# Altium PCB IRPCB.PcbDoc
Units mil, origin at the board's own origin, x right, y up, seen from the top; angles counter-clockwise.
Board outline 6000 x 4000 mil, 2 copper layers (Top Layer, Bottom Layer); 12 components, 8 nets, 33 pads, 0 vias.
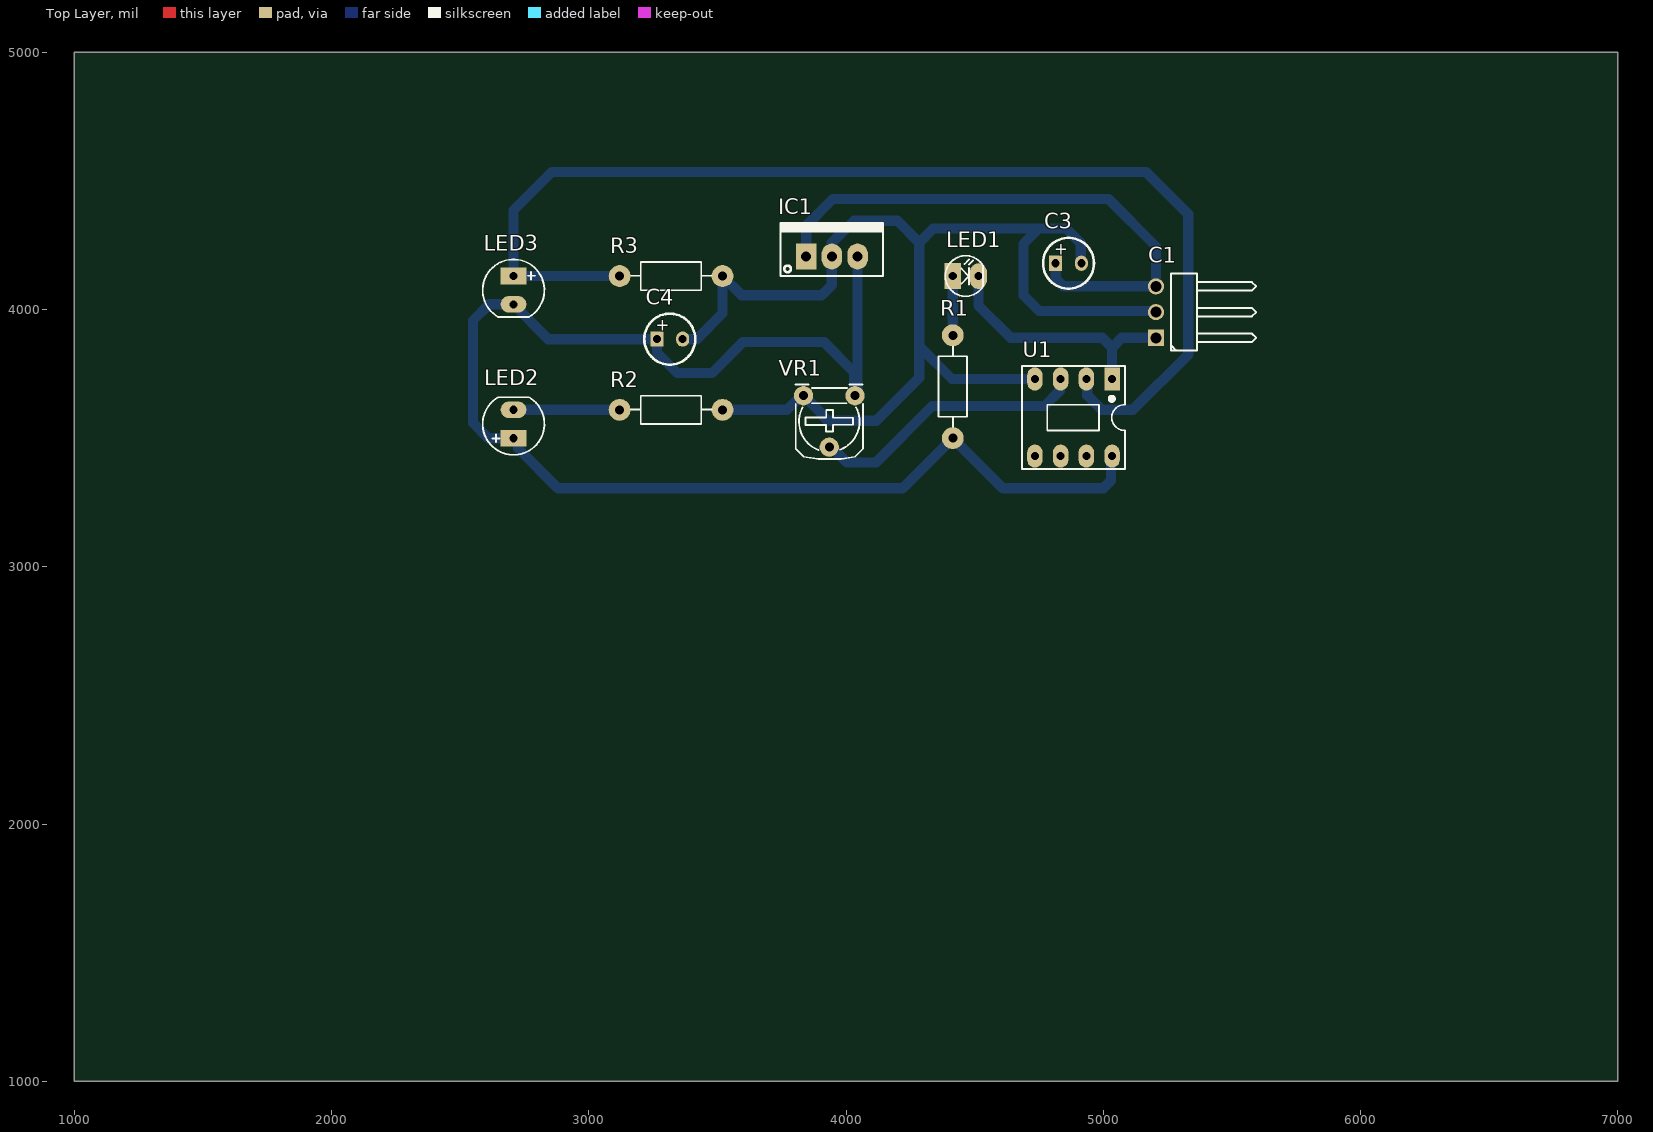
[diagram p0: Top Layer view]
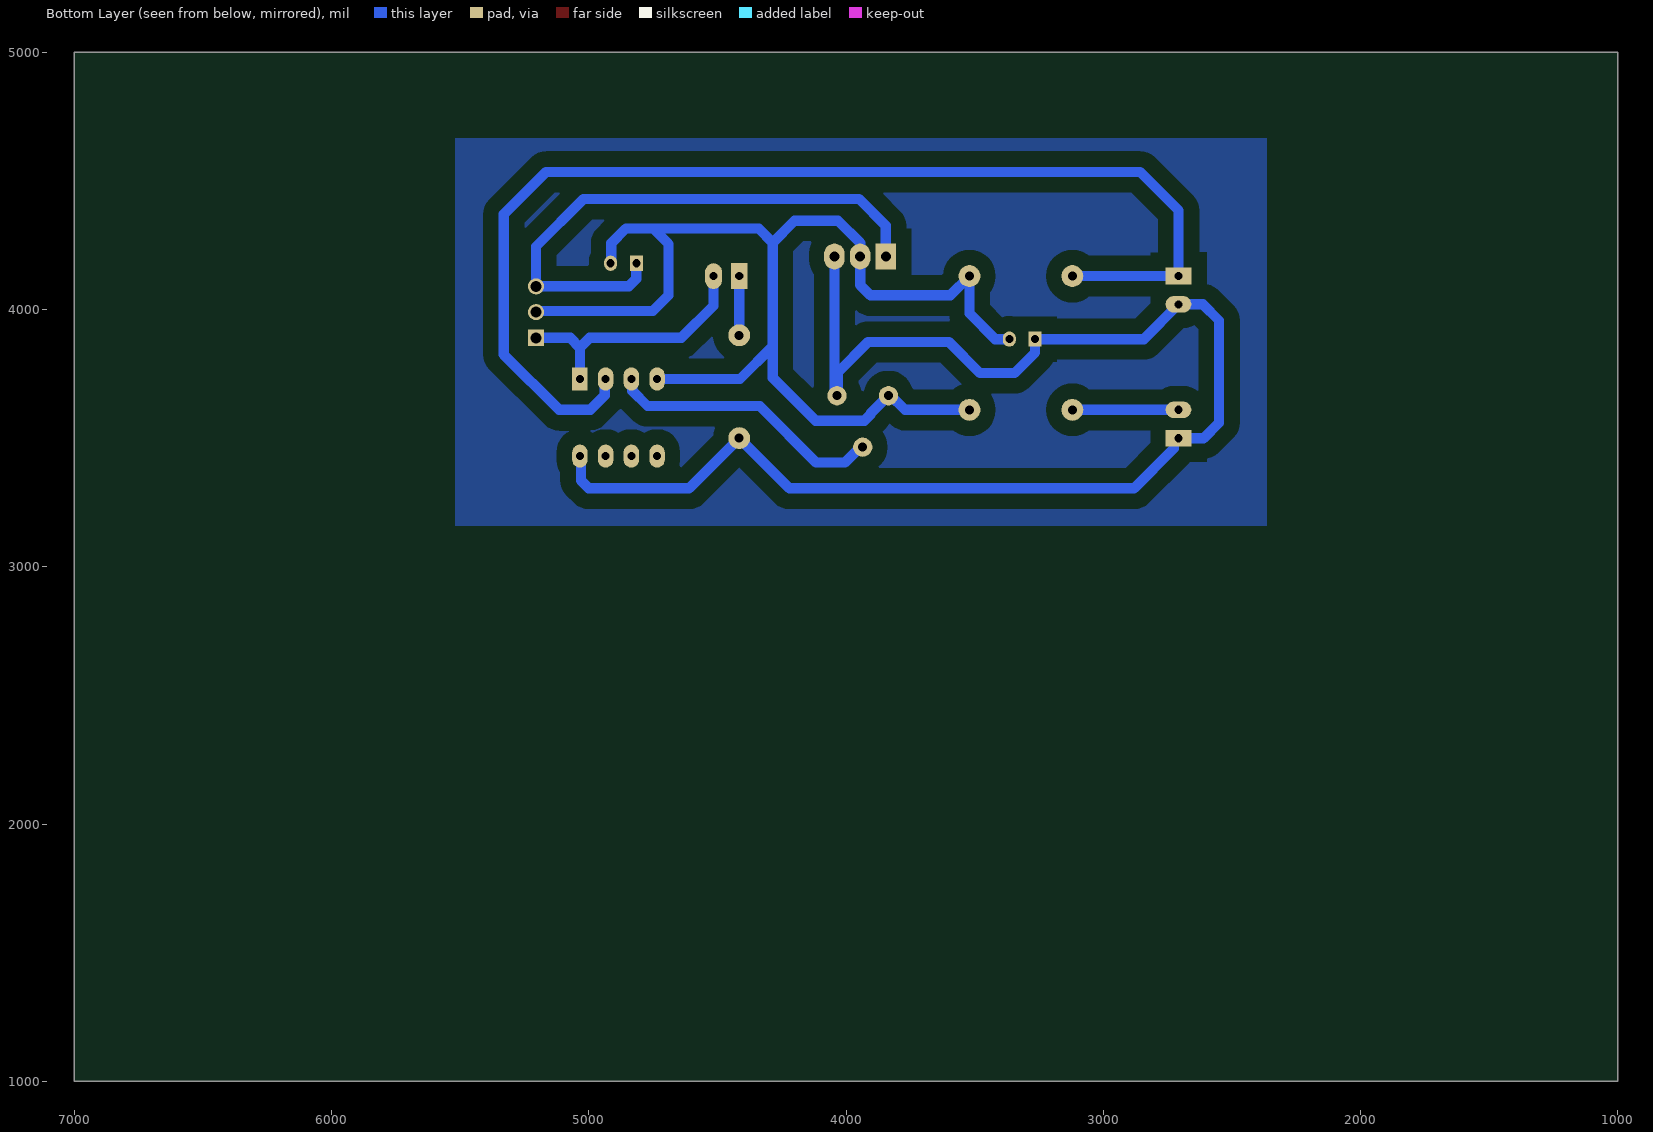
[diagram p1: Bottom Layer view, seen from below]
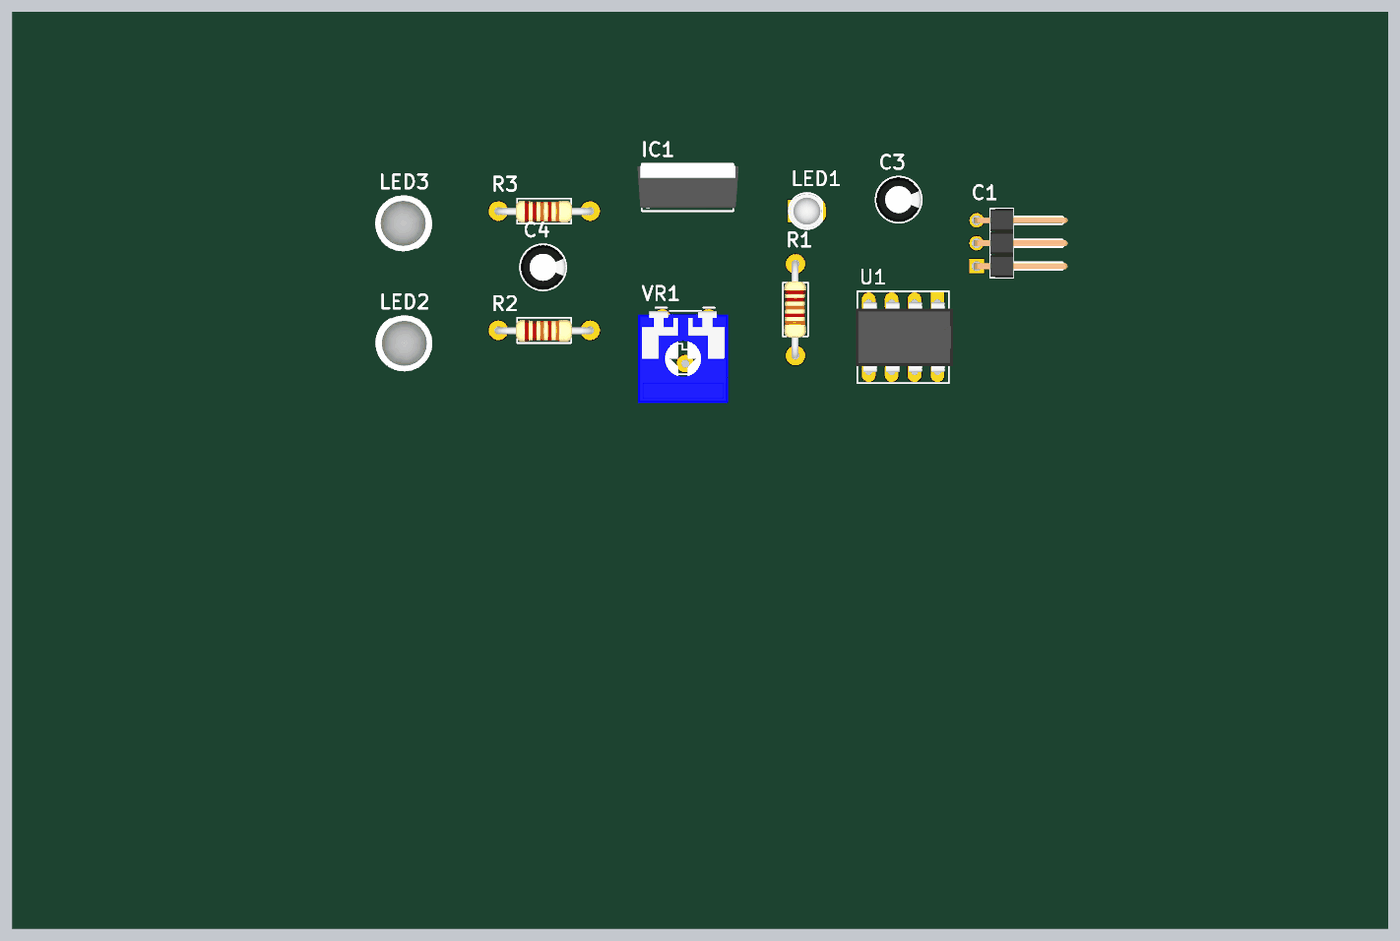
[diagram p2: 3D render of the assembled board from above, using the file's embedded part models]

## Layer stack, top to bottom
Top Solder: solder mask 0.4, Solder Resist, Dk 3.5
Top Layer: signal copper 1.4
Dielectric 1: dielectric 12.6, FR-4, Dk 4.8
Bottom Layer: signal copper 1.4
Bottom Solder: solder mask 0.4, Solder Resist, Dk 3.5

## Board outline
1000,1000 7000,1000 7000,5000 1000,5000

## Design rules (kind name [scope] priority, off if disabled: settings)
Clearance [All] p1: gap=60 ignorepadtopadclearanceinfootprint=FALSE
PolygonConnect [All] p1: connectstyle=Relief reliefconductorwidth=10 reliefentries=4 polygonreliefangle="90 Angle" airgapwidth=10
RoutingLayers [All] p1: top layer_v5=FALSE bottom layer_v5=TRUE
RoutingVias [All] p1: holewidth=28 width=50 viastyle="Through Hole" minholewidth=28 minwidth=50 maxholewidth=28 maxwidth=50
SolderMaskExpansion [All] p1: expansion=4
UnRoutedNet [All] p1: checkbadconnections=TRUE
Width [All] p1: maxlimit=50 minlimit=40 preferedwidth=40
28 further rules are at their usual default settings.

## Components (designator, comment, footprint, x,y, rotation, side; value= is the part's Value field where it differs from the comment)
C1 "JP3" JP3-D1C 5305,4140 r90 top
C3 "Cap Pol 5mm" C5mm 4865,4180 r0 top
C4 "Cap Pol 5mm" C5mm 3315,3885 r0 top
IC1 "LM7805" QTO-220 3845,4206.06 r0 top
LED1 "LED" LED-3 4415,4130 r0 top value="LED 3 ly Single Colour"
LED2 "LED" LED-5-WHITE 2707.5,3555 r90 top value="LED 3 ly Single Colour"
LED3 "LED" LED-5-WHITE 2707.5,4075 r270 top value="LED 3 ly Single Colour"
R1 "1k" R1/2W 4415,3500 r90 top value="R1/4W - 1K"
R2 "1k" R1/2W 3520,3610 r180 top value="R1/4W - 1K"
R3 "1k" R1/2W 3520,4130 r180 top value="R1/4W - 1K"
U1 "LM393" DIP8 4889.41,3580 r180 top
VR1 "10K" VR 4035,3665 r180 top value="VR 10K"

## Footprints (in the part's own frame and the unit in brackets; to place one, negate y for a bottom-side part, rotate by r counter-clockwise, add the part's x,y. Pads: shape width x height; smd on the part's side, far side on the other; paste and mask are expansions set on the pad)
C5mm [mm]
  rect 1.3x1.5 hole 0.8: 1(-1.27,0)
  oval 1.3x1.5 hole 0.8: 2(1.27,0)
  silkscreen extent -2.51,-2.51 2.51,2.51, body extent -2.5,-2.5 2.49,2.5, height 11.01
DIP8 [mil] "DIP, 8-Leads, Row Spacing 7.62mm, Pitch 2.54mm, Body 9.91x6.73mm"
  rect 60x90 hole 31: 1(-145,-150)
  oval 60x90 hole 31: 2(-45,-150) 3(55,-150) 4(155,-150) 5(155,150) 6(55,150) 7(-45,150) 8(-145,150)
  silkscreen extent -195,-200 205,200, body extent -213,-153 213,153, height 177
JP3-D1C [mm] "3 pins, 1 row, right angled, gold plating"
  rect 1.6x1.6 hole 1.1: 1(-6.35,2.54)
  round 1.6 hole 1.1: 2(-3.81,2.54) 3(-1.27,2.54)
  silkscreen extent -7.62,-7.34 0,1.04, body extent -7.62,-7.52 0,2.84, height 2.55
LED-3 [mil] "LED 2 PIN, 3ly Only colour"
  rect 65x100 hole 32: 1(0,0)
  oval 65x100 hole 32: 2(100,0)
  silkscreen extent -29,-78 118,79, body extent -25,-75 113,75, height 217
LED-5-WHITE [mil] "LED 2 PIN, 5 ly , Only colour, pin to pin 110mil"
  rect 65x100 hole 32: 1(-55,0)
  oval 65x100 hole 32: 2(55,0)
  silkscreen extent -120,-120 104,120, body extent -124,-125 121,120, height 340
QTO-220 [mil] "TO-220 - 1-2-3"
  rect 80x100 hole 39: 1(0,0)
  oval 80x100 hole 39: 2(100,0) 3(200,0)
  silkscreen extent -100,-76 300,130, body extent -119,-64 322,121, height 755
R1/2W [mil] "R 1/2W, 2 pin, 300mil"
  round 85 hole 35: 1(0,0) 2(400,0)
  silkscreen extent 42,-55 356,55, body extent -12,-45 414,49, height 91
VR [mil] "Resistor Variable"
  round 75 hole 35: 1(0,0) 2(100,200) 3(200,0)
  silkscreen extent -31,-44 231,246, body extent -87,-30 307,372, height 165

## Part data
C1: "WR-PHD 2.54 mm Angled Socket Header", Manufacturer="Würth Elektronik eiSos GmbH", partNo=613003143121, ComponentLink1 Description=Manufacturer, ComponentLink1URL=http://www.we-online.com, ComponentLink2 Description=Datasheet, ComponentLink2URL=http://katalog.we-online.de/em/datasheet/6130xx143121.pdf, Created by="Karrer Zheng", Created Date="29 March 2013", NoPins=03
C3 C4: "Polarized Capacitor (Axial)", LatestRevisionDate=17-Jul-2002, LatestRevisionNote="Re-released for DXP Platform.", PackageReference=POLAR0.8, Published=8-Jun-2000, Publisher="Altium Limited"
IC1: library part LM78xx, "On ap +, from + 5 to + 24VDC", =LM7808
LED1 LED2 LED3: "LED Single colour Green and Red"
R1 R2 R3: library part R1/4W, "Resistor 1/4W"
U1: "IC DUAL COMPARATOR"
VR1: library part VR, "Var Resistor"

## Nets (pads, with @x,y where several pads share a name; then routed paths per layer and width w, separated by ;. In a path a pad name is that pad's centre, name@x,y a point inside that pad or via, vN(x,y) a via of type N, cw(c..) or ccw(c..) an arc to the next point about the centre after c; other vN are vias at no path point)
GND: C1.2 C3.2 C4.2 IC1.2 R2.1 R3.1 U1.4 VR1.3 | length 4895.7
  Bottom Layer w40: C4.2 3420,3885 3520,3985 R3.1 3595,4055 3905,4055 3945,4095 IC1.2 3945,4259 4031,4345 4200.32,4345 4285,4260.32 ; R2.1 3770.53,3610 3825.53,3665 VR1.3 3905,3595 3905,3590.93 3928.43,3567.5 4117.5,3567.5 4285,3735 4285,3857 ; U1.4 4412,3730 4285,3857 ; C3.2 4912.86,4182.14 4912.86,4257.78 4855.64,4315 4750,4315 ; C1.2 5200.6,3994.4 4750.6,3994.4 4690,4055 4690,4255 4750,4315 ; 4285,3857 4285,4260.32 ; 4285,4260.32 4339.68,4315 4750,4315
NetC1_1: C1.1 LED1.2 U1.1 | length 1010.3
  Bottom Layer w40: LED1.2 4515,4015 4640,3890 4996.41,3890 5034.41,3852 ; U1.1 5034.41,3852 ; C1.1 5072.41,3890 5034.41,3852
NetC4_1: C4.1 IC1.3 LED2.1 LED3.2 R1.1 U1.8 VR1.1 | length 5692.4
  Bottom Layer w40: IC1.3 4045,3684.47 4035,3674.47 VR1.1 4031,3669 4031,3756.5 3913.5,3874 3600,3874 3479,3753 3345,3753 3265,3833 C4.1 2842.5,3885 LED3.2 2612.5,4020 2550,3957.5 2550,3560 2610,3500 LED2.1 2725,3500 2725,3460 2880,3305 4220,3305 R1.1 4610,3305 5000,3305 5030.58,3335.58 5030.58,3426.17 U1.8 ; U1.8@5029.41,3415 U1.8@5029.41,3445
NetLED1_1: LED1.1 R1.2 | length 230
  Bottom Layer w40: R1.2 LED1.1
NetLED2_2: LED2.2 R2.2 | length 412.5
  Bottom Layer w40: LED2.2 R2.2
NetLED3_1: LED3.1 R3.2 U1.2 | length 4535.9
  Bottom Layer w40: R3.2 LED3.1 2707,4130 2707,4385 2857,4535 5165,4535 5330,4370 5330,3825 5115,3610 4994.56,3610 4938.24,3666.32 4938.24,3726.17 U1.2
NetU1_3: U1.3 VR1.2 | length 1093.1
  Bottom Layer w40: VR1.2@3935,3455.53 VR1.2 3944.47,3465 4004.47,3405 4115.5,3405 4335.5,3625 4771.69,3625 4830.58,3683.89 4830.58,3726.17 U1.3
VCC: C1.3 C3.1 IC1.1 | length 2216.9
  Bottom Layer w40: IC1.1 3845,4325.64 3949.36,4430 5020,4430 5205,4245 C1.3 4845,4090 4815,4120 C3.1
pads on no net: U1.5 U1.6 U1.7

## Polygon pours and split planes (outlines as drawn)
no net on Top Layer "Top Layer-No Net" (solid, pour order 8): 5115,2950
no net on Top Layer "Top Layer-No Net 1" (solid, pour order 4): 1475,4590
no net on Top Layer "Top Layer-No Net 2" (solid, pour order 0): 5070,4480
no net on Bottom Layer (solid, pour order 16): 2550,4765
no net on Bottom Layer (solid, pour order 14): 5520,4665 5520,3160 2365,3160 2365,4665
no net on Bottom Layer "Bottom Layer-No Net" (solid, pour order 12): 2570,4725

## Text inside footprints (layer, text, board x,y; h text height)
C3: Top Overlay "+" at 4810,4213 h47.24
C4: Top Overlay "+" at 3260,3918 h47.24